# Altium PCB hermes.PcbDoc
Units mm, origin at the board's own origin, x right, y up, seen from the top; angles counter-clockwise.
Board outline 43.81 x 20.19 mm, 2 copper layers (Top Layer, Bottom Layer); 15 components, 16 nets, 93 pads, 15 vias.
Unrouted connection lines stored in the file: 7.
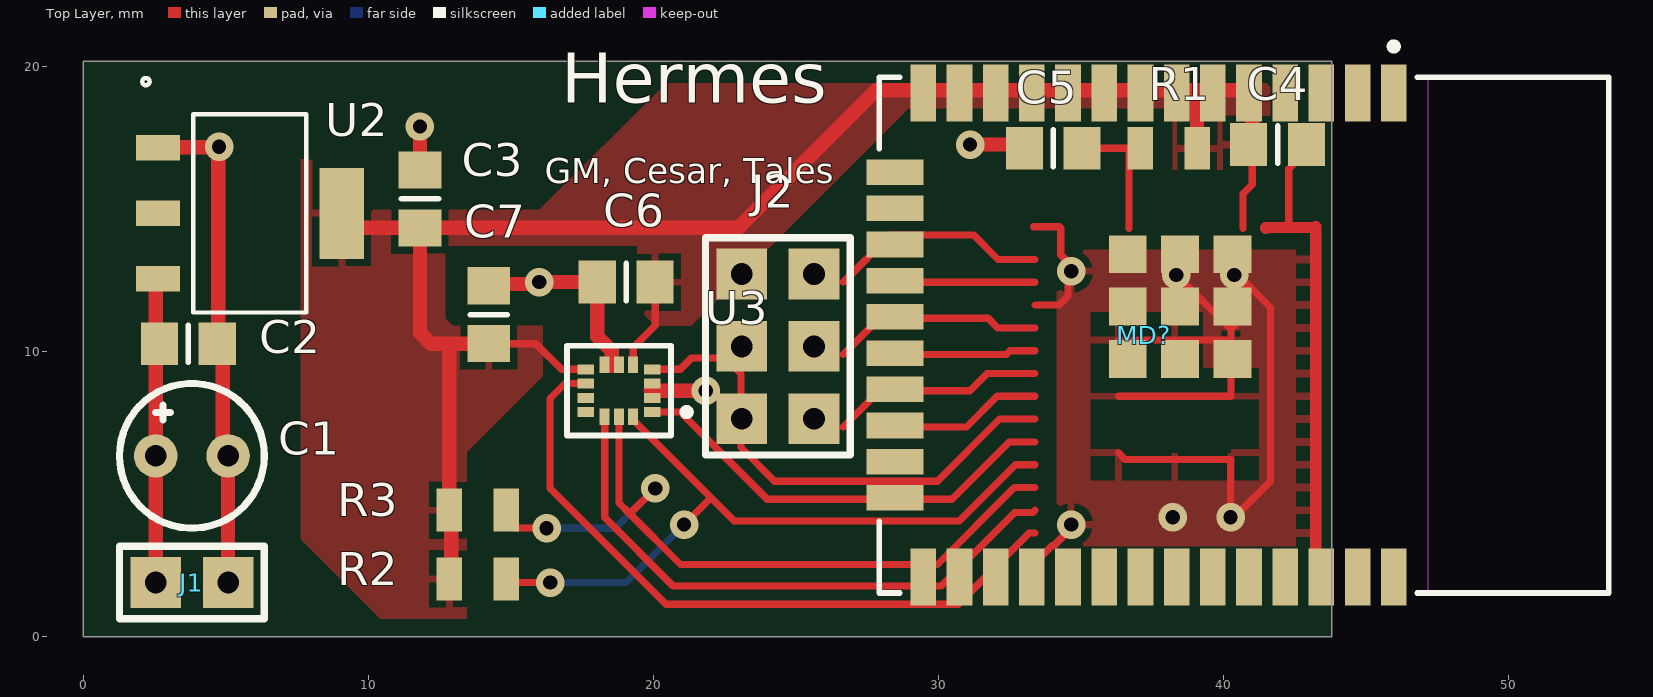
[diagram p0: Top Layer view]
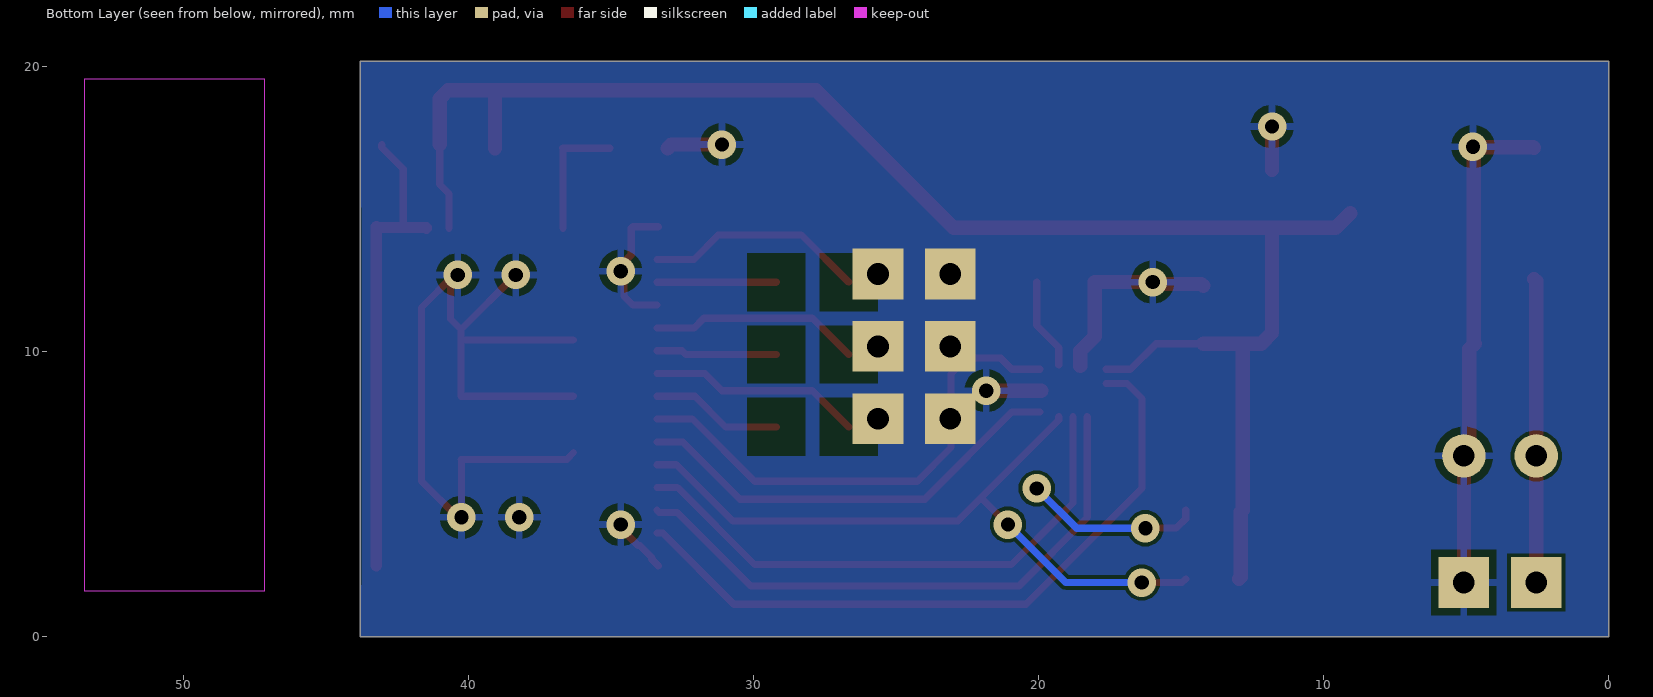
[diagram p1: Bottom Layer view, seen from below]

## Layer stack, top to bottom
Top Solder: solder mask 0.0102, Solder Resist, Dk 3.5
Top Layer: signal copper 0.0356
Dielectric 1: dielectric 0.32, FR-4, Dk 4.8
Bottom Layer: signal copper 0.0356
Bottom Solder: solder mask 0.0102, Solder Resist, Dk 3.5

## Board outline
0,0 0,20.193 43.815,20.193 43.815,0

## Design rules (kind name [scope] priority, off if disabled: settings)
Clearance [All] p1: gap=0.127 ignorepadtopadclearanceinfootprint=FALSE
ComponentClearance [All] p1: gap=0.254 collisioncheckmode=3 verticalgap=0 showdistances=FALSE
PolygonConnect [All] p1: connectstyle=Relief reliefconductorwidth=0.254 reliefentries=4 polygonreliefangle="90 Angle" airgapwidth=0.254
RoutingVias [All] p1: holewidth=0.711 width=1.27 viastyle="Through Hole" minholewidth=0.711 minwidth=1.27 maxholewidth=0.711 maxwidth=1.27
SolderMaskExpansion [All] p1: expansion=0.102 istentingtop=FALSE
Width [All] p1: maxlimit=0.5 minlimit=0.254 preferedwidth=0.4
29 further rules are at their usual default settings.

## Components (designator, comment, footprint, x,y, rotation, side; value= is the part's Value field where it differs from the comment)
C1 "CAP" "CAP ELET .100" 3.81,6.35 r180 top
C2 "CAP" "CAP 0805" 3.683,10.287 r180 top
C3 "CAP" "CAP 0805" 11.811,15.367 r270 top
C4 "CAP" "CAP 0805" 41.91,17.272 r180 top
C5 "CAP" "CAP 0805" 34.036,17.145 r0 top
C6 "CAP" "CAP 0805" 19.05,12.446 r0 top
C7 "CAP" "CAP 0805" 14.224,11.303 r270 top
J1 "CONECTOR_2PIN" CON2 2.54,1.905 r0 top
J2 "CONECTOR_6PIN_3x2" CON6_3x2 23.1,12.73 r270 top
MD? "ESP32-WROOM-32" FP-ESP32-WROOM-32-MFG 40.725,10.59 r270 top
R1 "RESISTOR" "RES 0805" 38.084,17.145 r0 top value=10k
R2 "RESISTOR" "RES 0805" 13.843,2.032 r180 top value=10k
R3 "RESISTOR" "RES 0805" 13.843,4.445 r180 top value=10k
U2 "1117-3.3" SOT223_STM 5.842,14.859 r270 top
U3 "LSM6DSOXTR" FP-LGA-14L-DM00249496-MFG 18.796,8.636 r180 top

## Footprints (in the part's own frame and the unit in brackets; to place one, negate y for a bottom-side part, rotate by r counter-clockwise, add the part's x,y. Pads: shape width x height; smd on the part's side, far side on the other; paste and mask are expansions set on the pad)
"CAP 0805" [mm] "0805"
  rect 1.3x1.5 smd: 1(-1.016,0) 2(1.016,0)
  silkscreen extent 0,-0.65 0,0.65, body extent -1.03,-0.61 0.97,0.59, height 0.88
"CAP ELET .100" [mil]
  round 60 hole 30: 1(-50,0) 2(50,0)
  silkscreen extent -100,-100 100,100, body extent -98,-99 98,98, height 453
CON2 [mil]
  rect 70x70 hole 30: 1(0,0) 2(100,0)
  silkscreen extent -50,-50 150,50, body extent -42,-47 143,45, height 519
CON6_3x2 [mil]
  rect 70x70 hole 30: 1(0,0) 2(100,0) 3(200,0) 4(200,100) 5(100,100) 6(0,100)
  silkscreen extent -50,-50 250,150, body extent -50,-47 250,147, height 519
FP-ESP32-WROOM-32-MFG [mm]
  rect 2x0.9 smd paste+0 mask+0: 1(-8.5,5.26) 2(-8.5,3.99) 3(-8.5,2.72) 4(-8.5,1.45) 5(-8.5,0.18) 6(-8.5,-1.09) 7(-8.5,-2.36) 8(-8.5,-3.63) 9(-8.5,-4.9) 10(-8.5,-6.17) 11(-8.5,-7.44) 12(-8.5,-8.71) 13(-8.5,-9.98) 14(-8.5,-11.25) 25(8.5,-11.25) 26(8.5,-9.98) 27(8.5,-8.71) 28(8.5,-7.44) 29(8.5,-6.17) 30(8.5,-4.9) 31(8.5,-3.63) 32(8.5,-2.36) 33(8.5,-1.09) 34(8.5,0.18) 35(8.5,1.45) 36(8.5,2.72) 37(8.5,3.99) 38(8.5,5.26)
  rect 0.9x2 smd paste+0 mask+0: 15(-5.715,-12.25) 16(-4.445,-12.25) 17(-3.175,-12.25) 18(-1.905,-12.25) 19(-0.635,-12.25) 20(0.635,-12.25) 21(1.905,-12.25) 22(3.175,-12.25) 23(4.445,-12.25) 24(5.715,-12.25)
  rect 1.33x1.33 smd paste+0 mask+0: 39(-2.835,-0.405) 39(-2.835,-2.24) 39(-2.835,-4.075) 39(-1,-0.405) 39(-1,-2.24) 39(-1,-4.075) 39(0.835,-0.405) 39(0.835,-2.24) 39(0.835,-4.075)
  Keep-Out Layer region: -9,6.45 9,6.45 9,12.75 -9,12.75
  Keep-Out Layer region: -9,6.45 9,6.45 9,12.75 -9,12.75
  silkscreen extent -10.25,-12.8 9.05,12.8, body extent -9.6,-13.35 9.6,12.9, height 0.25
FP-LGA-14L-DM00249496-MFG [mm]
  rect 0.575x0.35 smd paste+0 mask+0: 1(-1.162,0.75) 2(-1.162,0.25) 3(-1.162,-0.25) 4(-1.162,-0.75) 8(1.162,-0.75) 9(1.162,-0.25) 10(1.162,0.25) 11(1.162,0.75)
  rect 0.35x0.575 smd paste+0 mask+0: 5(-0.5,-0.913) 6(0,-0.913) 7(0.5,-0.913) 12(0.5,0.913) 13(0,0.913) 14(-0.5,0.913)
  silkscreen extent -2.5,-1.58 1.83,1.58, body extent -2.05,-1.8 2.05,1.8, height 0.25
"RES 0805" [mm] "0805 (1/8W)"
  rect 0.9x1.5 smd: 1(-1,0) 2(1,0)
  body extent -1.02,-0.62 0.95,0.6, height 0.48
SOT223_STM [mil]
  rect 35.46x61 smd paste+0 mask+0: 1(-90.55,-127) 2(0,-127) 3(90.55,-127)
  rect 126x61 smd paste+0 mask+0: 4(0,127)
  silkscreen extent -187,-148 137,78, body extent -132,-144 132,144, height 71

## Part data
C1: library part "CAP. ELETROLÍTICO", "Capacitor", Valor=1000uF
C2 C3 C4 C5 C6 C7: library part "CAP. CERÂMICO", "Capacitor", Criado em=26/06/2012, Criador por="Luigi Eduardo", Pertence a=Trincabotz, Valor=100nF
MD?: library part CMP-194065-000008-1, "RX TXRX MOD WIFI SURFACE MOUNT", Case/Package=SMD/SMT, Frequency=2.5GHz, Max Operating Temperature=85°C, Min Operating Temperature=-40°C, Operating Supply Voltage=3.6V, Package Quantity=550, Data Rate=150Mbps, Mount="Surface Mount", Packaging="Cut Tape", Sensitivity=-98dBm, Weight=0.088185oz
R1 R2 R3: "Resistor"
U2: library part LDL1117S50R, "No Description Available", Mfr_Name=STMicroelectronics, Copyright="Copyright (C) 2024 Ultra Librarian. All rights reserved.", Manufacturer_Part_Number=LDL1117S50R, RefDes=RefDes, Type=DEV
U3: library part CMP-12177-000010-1, "INEMO INERTIAL MODULE: 3D ACCELE", Manufacturer=STMicroelectronics, Max Supply Voltage=3.6V, Min Supply Voltage=1.62V, Operating Supply Current=0.55mA, Package=LGA-14L-DM00249496, Temperature="-40°C to +85°C", Temperature Range High=+85°C, Temperature Range Low=-40°C, Accel Range=2/4/8/16g, Accel Sensitivity=0.061/0.122/0.244/0.488mV/g, Automotive=No, Category=IC, ComponentLink2Description=Datasheet, ComponentLink2URL=https://www.st.com/resource/en/datasheet/lsm6dsox.pdf, Device Class L1=Sensors, Device Class L2="Motion Sensors", Device Class L3="Inertial Measurement Units (IMUs)", Digikey Description="INEMO INERTIAL MODULE: 3D ACCELE", Footprint Url=https://www.st.com/content/ccc/resource/technical/document/technical_note/73/17/9c/16/dd/96/4a/01/CD00134799.pdf/files/CD00134799.pdf/jcr:content/translations/en.CD00134799.pdf, Gyro Range=125/250/500/1000/2000°/s, Gyro Sensitivity=4.375/8.75/17.5/35/70LSB/°/s, Height=0.86mm, Lead Free=Yes, Manufacturer Part Number=LSM6DSOXTR, Mouser Description="LSM6DSOX: 3.6 V 3 Axis Accelerometer Gyroscope iNEMO Inertial Module - LGA-14L", Octopart=https://octopart.com/lsm6dsoxtr-stmicroelectronics-98102600, RoHS=TRUE, Sensor Output=I2C,SPI,Other, Sensor Type=Temperature,Accelerometer,Gyroscope

## Via types
v1: diameter 1, hole 0.5, Top Layer to Bottom Layer, 15 vias

## Nets (pads, with @x,y where several pads share a name; then routed paths per layer and width w, separated by ;. In a path a pad name is that pad's centre, name@x,y a point inside that pad or via, vN(x,y) a via of type N, cw(c..) or ccw(c..) an arc to the next point about the centre after c; other vN are vias at no path point)
+3V3: C3.2 C4.2 C6.2 C7.2 R1.2 R2.2 R3.2 U2.2 U2.4 U3.5 U3.8 | length 62.7
  Top Layer w0.254: C7.2 15.875,10.287 16.776,9.386 U3.8 ; U3.5 19.296,10.152 20.066,10.922 C6.2 ; 40.697,14.339 40.697,15.551 41.021,15.875 C4.2@41.021,17.272
  Top Layer w0.5: U2.4 9.576,14.351 C3.2 ; R2.2@12.97,2.032 12.906,2.095 12.906,4.381 R3.2 12.843,10.144 12.7,10.287 ; C7.2 12.7,10.287 ; R1.2 39.084,19.082 38.989,19.177 ; C4.2@41.021,17.272 41.021,18.884 40.728,19.177 38.989,19.177 ; C3.2 22.987,14.351 27.813,19.177 38.989,19.177 ; C3.2 11.811,10.668 12.192,10.287 12.7,10.287
+5V: C1.2 C2.2 J1.1 U2.3 | length 10.7
  Top Layer w0.5: J1.1 C1.2 2.54,12.483 U2.3
ChipSelect_IMU: U3.12 | length 20.7
  Top Layer w0.254: U3.12 18.296,4.183 20.701,1.778 30.099,1.778 32.684,4.363 33.321,4.363 33.397,4.439
GND: C1.1 C2.1 C3.1 C4.1 C5.1 C6.1 C7.1 J1.2 U2.1 U3.2 U3.3 U3.6 U3.7 | length 84.9
  Top Layer w0.254: 33.347,2.489 33.576,2.718 33.576,2.786 33.989,3.199 34.057,3.199 34.671,3.813 v1(34.671,3.937) ; 33.347,14.389 34.247,14.389 34.297,14.339 34.297,13.403 34.671,13.029 v1(34.671,12.827) 34.552,12.708 34.552,11.946 34.245,11.639 33.397,11.639 ; 36.322,6.464 36.563,6.223 40.272,6.223 40.259,6.21 v1(40.259,4.191) 40.386,4.191 41.656,5.461 41.656,11.557 40.513,12.7 v1(40.386,12.7) 40.64,12.446 40.64,11.15 40.272,10.782 ; 36.322,8.439 38.297,8.439 40.272,8.439 40.272,10.414 ; 36.322,10.414 38.297,10.414 40.272,10.414 ; v1(38.354,12.7) 40.272,10.782 ; 42.297,14.339 42.297,14.364 42.297,16.416 43.053,17.172 C4.1@43.053,17.272 ; 40.272,10.414 40.272,10.782
  Top Layer w0.4: 41.497,14.339 41.497,14.361 41.5,14.364 42.297,14.364 43.222,14.364 43.247,14.389 43.247,13.239 43.247,10.039 43.247,6.039 43.247,4.439 43.247,2.489
  Top Layer w0.5: U2.1 2.637,17.18 v1@4.739,17.18 ; v1(4.76,17.2) v1@4.739,17.18 ; J1.2 C1.1 4.889,6.54 4.889,10.096 C2.1 4.73,10.318 4.73,17.17 v1@4.739,17.18 ; C3.1 v1(11.811,17.907) ; C7.1 14.287,12.383 15.938,12.383 v1(16.002,12.446) C6.1 18.034,10.541 18.542,10.033 18.542,9.5 ; 19.9,8.636 v1(21.844,8.636) ; v1(31.115,17.272) 32.893,17.272 C5.1
  other v1: 38.227,4.191
I2C_AddressBit: U3.1 | length 15.5
  Top Layer w0.254: U3.1 20.943,7.886 24.003,4.826 30.48,4.826 32.493,6.839 33.397,6.839
I2C_SCL: R3.1 U3.13 | length 27.1
  Top Layer w0.254: R3.1 14.843,4.145 15.166,3.822 16.244,3.822 v1(16.256,3.81) ; U3.13 18.796,4.699 19.177,4.318 ; v1(20.066,5.207) 19.177,4.318 ; 33.397,5.239 32.671,5.239 29.972,2.54 20.955,2.54 19.177,4.318
  Bottom Layer w0.254: v1(16.256,3.81) 18.669,3.81 v1(20.066,5.207)
I2C_SDA: R2.1 U3.14 | length 25
  Top Layer w0.254: R2.1 14.97,1.905 v1(16.383,1.905) ; U3.14 19.296,7.611 22.026,4.881 ; v1(21.082,3.937) 22.026,4.881 ; 33.397,6.039 32.709,6.039 30.734,4.064 22.843,4.064 22.026,4.881
  Bottom Layer w0.254: v1(16.383,1.905) 19.05,1.905 v1(21.082,3.937)
Interrupt1_IMU: U3.4 | length 17.8
  Top Layer w0.254: U3.4 20.943,9.386 21.336,9.779 22.521,9.779 23.075,9.225 23.075,6.643 24.257,5.461 29.972,5.461 32.15,7.639 33.397,7.639
Interrupt2_IMU: U3.9 | length 24.4
  Top Layer w0.254: U3.9 16.905,8.886 16.379,8.36 16.379,5.211 20.447,1.143 30.698,1.143 33.194,3.639 33.397,3.639
NetC5_2: C5.2 R1.1 | length 4.5
  Top Layer w0.254: C5.2 36.703,17.145 36.697,17.139 36.697,14.339
RadioEntrada1: J2.4 | length 4.6
  Top Layer w0.254: 29.21,7.366 30.988,7.366 32.061,8.439 33.397,8.439
RadioEntrada2: J2.5 | length 4.2
  Top Layer w0.254: 29.21,9.906 32.385,9.906 32.518,10.039 33.397,10.039
RadioEntrada3: J2.6 | length 4.2
  Top Layer w0.254: 29.21,12.446 29.217,12.439 33.397,12.439
RadioSaida1: J2.3 | length 7.5
  Top Layer w0.254: 26.67,7.366 27.94,8.636 31.115,8.636 31.718,9.239 33.397,9.239
RadioSaida2: J2.2 | length 7.4
  Top Layer w0.254: 26.67,9.906 27.94,11.176 31.75,11.176 32.087,10.839 33.397,10.839
RadioSaida3: J2.1 | length 7.8
  Top Layer w0.254: 26.67,12.446 28.321,14.097 31.242,14.097 32.1,13.239 33.397,13.239
pads on no net: MD?.1 MD?.2 MD?.3 MD?.4 MD?.5 MD?.6 MD?.7 MD?.8 MD?.9 MD?.10 MD?.11 MD?.12 MD?.13 MD?.14 MD?.15 MD?.16 MD?.17 MD?.18 MD?.19 MD?.20 MD?.21 MD?.22 MD?.23 MD?.24 MD?.25 MD?.26 MD?.27 MD?.28 MD?.29 MD?.30 MD?.31 MD?.32 MD?.33 MD?.34 MD?.35 MD?.36 MD?.37 MD?.38 MD?.39 U3.10 U3.11

## Polygon pours and split planes (outlines as drawn)
+3V3 on Top Layer "+3V3_L01_P000" (solid, pour order 0): 10.16,16.764 7.62,16.764 7.62,3.429 10.414,0.635 13.462,0.635 13.462,6.477 16.129,9.144 16.129,10.922 12.954,10.922 12.7,11.176 12.7,13.716 19.431,13.716 19.431,11.557 20.066,10.922 21.336,10.922 28.956,18.542 38.227,18.542 38.227,16.383 41.656,16.383 41.656,19.304 41.529,19.431 20.447,19.431 16.002,14.986 10.16,14.986
GND on Top Layer "GND_L01_P002" (solid, pour order 2): 34.163,13.589 43.561,13.589 43.561,3.175 42.672,3.175 34.544,3.175 34.036,3.683 34.163,3.81 34.163,12.192
GND on Bottom Layer "GND_L02_P001" (solid, pour order 1): 0,20.193 43.815,20.193 43.815,0 0,0

## Silkscreen, mask and mechanical layers (free items; w line width, h text height)
Top Overlay:
  text "Hermes" at 16.764,18.161 h3
  text "GM, Cesar, Tales" at 16.183,15.621 h1.52
Mechanical 1:
  the board outline again, w0.254